# EAGLE board breakout (EAGLE 6.4)
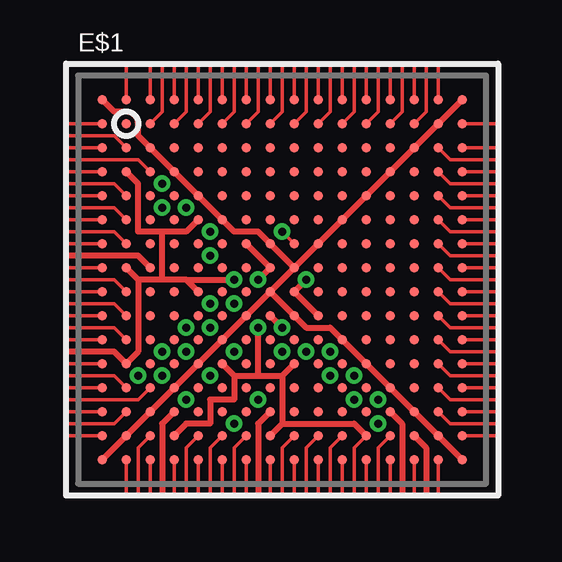
[diagram p0: board, top side]
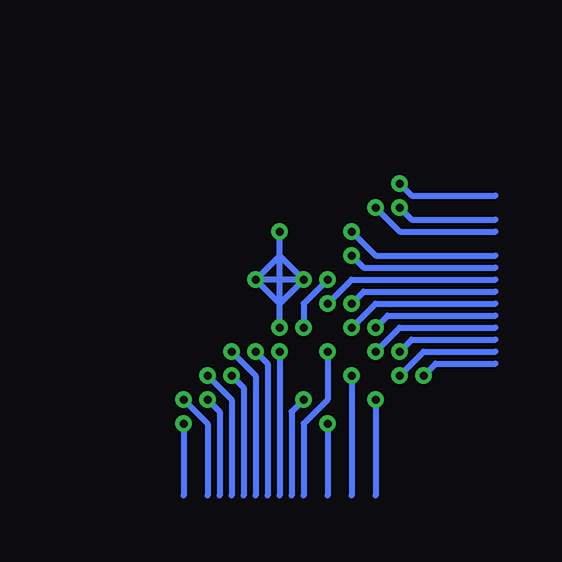
[diagram p1: board, bottom side, seen from below]

No outline drawn. Coordinates in mm, seen from the top.
Copper layers (1*16): Top 0.0356mm / dielectric 1.5011mm / Bottom 0.0356mm
Design rules "OSHPark_mine": minimum track width 6mil, minimum drill 13mil, track to track 6mil, track to pad 6mil, pad to pad 6mil, via to via 6mil, smd to smd 6mil, copper to edge 15mil, drill to drill 6mil, minimum pad ring 7mil, minimum via ring 7mil, stop-mask expansion 2mil, vias tented up to drill 13mil, thermal gap 10mil

## Footprints (pad centres in the part's own frame; a part is rotated, then mirrored left to right if it is on the bottom)
XILINX_FT256 = smd 0.4 x 0.4: A1 -7.5,7.5; A2 -6.5,7.5; A3 -5.5,7.5; A4 -4.5,7.5; A5 -3.5,7.5; A6 -2.5,7.5; A7 -1.5,7.5; A8 -0.5,7.5; A9 0.5,7.5; A10 1.5,7.5; A11 2.5,7.5; A12 3.5,7.5; A13 4.5,7.5; A14 5.5,7.5; A15 6.5,7.5; A16 7.5,7.5; B1 -7.5,6.5; B2 -6.5,6.5; B3 -5.5,6.5; B4 -4.5,6.5; B5 -3.5,6.5; B6 -2.5,6.5; B7 -1.5,6.5; B8 -0.5,6.5; B9 0.5,6.5; B10 1.5,6.5; B11 2.5,6.5; B12 3.5,6.5; B13 4.5,6.5; B14 5.5,6.5; B15 6.5,6.5; B16 7.5,6.5; C1 -7.5,5.5; C2 -6.5,5.5; C3 -5.5,5.5; C4 -4.5,5.5; C5 -3.5,5.5; C6 -2.5,5.5; C7 -1.5,5.5; C8 -0.5,5.5; C9 0.5,5.5; C10 1.5,5.5; C11 2.5,5.5; C12 3.5,5.5; C13 4.5,5.5; C14 5.5,5.5; C15 6.5,5.5; C16 7.5,5.5; D1 -7.5,4.5; D2 -6.5,4.5; D3 -5.5,4.5; D4 -4.5,4.5; D5 -3.5,4.5; D6 -2.5,4.5; D7 -1.5,4.5; D8 -0.5,4.5; D9 0.5,4.5; D10 1.5,4.5; D11 2.5,4.5; D12 3.5,4.5; D13 4.5,4.5; D14 5.5,4.5; D15 6.5,4.5; D16 7.5,4.5; E1 -7.5,3.5; E2 -6.5,3.5; E3 -5.5,3.5; E4 -4.5,3.5; E5 -3.5,3.5; E6 -2.5,3.5; E7 -1.5,3.5; E8 -0.5,3.5; E9 0.5,3.5; E10 1.5,3.5; E11 2.5,3.5; E12 3.5,3.5; E13 4.5,3.5; E14 5.5,3.5; E15 6.5,3.5; E16 7.5,3.5; F1 -7.5,2.5; F2 -6.5,2.5; F3 -5.5,2.5; F4 -4.5,2.5; F5 -3.5,2.5; F6 -2.5,2.5; F7 -1.5,2.5; F8 -0.5,2.5; F9 0.5,2.5; F10 1.5,2.5; F11 2.5,2.5; F12 3.5,2.5; F13 4.5,2.5; F14 5.5,2.5; F15 6.5,2.5; F16 7.5,2.5; G1 -7.5,1.5; G2 -6.5,1.5; G3 -5.5,1.5; G4 -4.5,1.5; G5 -3.5,1.5; G6 -2.5,1.5; G7 -1.5,1.5; G8 -0.5,1.5; G9 0.5,1.5; G10 1.5,1.5; G11 2.5,1.5; G12 3.5,1.5; G13 4.5,1.5; G14 5.5,1.5; G15 6.5,1.5; G16 7.5,1.5; H1 -7.5,0.5; H2 -6.5,0.5; H3 -5.5,0.5; H4 -4.5,0.5; H5 -3.5,0.5; H6 -2.5,0.5; H7 -1.5,0.5; H8 -0.5,0.5; H9 0.5,0.5; H10 1.5,0.5; H11 2.5,0.5; H12 3.5,0.5; H13 4.5,0.5; H14 5.5,0.5; H15 6.5,0.5; H16 7.5,0.5; J1 -7.5,-0.5; J2 -6.5,-0.5; J3 -5.5,-0.5; J4 -4.5,-0.5; J5 -3.5,-0.5; J6 -2.5,-0.5; J7 -1.5,-0.5; J8 -0.5,-0.5; J9 0.5,-0.5; J10 1.5,-0.5; J11 2.5,-0.5; J12 3.5,-0.5; J13 4.5,-0.5; J14 5.5,-0.5; J15 6.5,-0.5; J16 7.5,-0.5; K1 -7.5,-1.5; K2 -6.5,-1.5; K3 -5.5,-1.5; K4 -4.5,-1.5; K5 -3.5,-1.5; K6 -2.5,-1.5; K7 -1.5,-1.5; K8 -0.5,-1.5; K9 0.5,-1.5; K10 1.5,-1.5; K11 2.5,-1.5; K12 3.5,-1.5; K13 4.5,-1.5; K14 5.5,-1.5; K15 6.5,-1.5; K16 7.5,-1.5; L1 -7.5,-2.5; L2 -6.5,-2.5; L3 -5.5,-2.5; L4 -4.5,-2.5; L5 -3.5,-2.5; L6 -2.5,-2.5; L7 -1.5,-2.5; L8 -0.5,-2.5; L9 0.5,-2.5; L10 1.5,-2.5; L11 2.5,-2.5; L12 3.5,-2.5; L13 4.5,-2.5; L14 5.5,-2.5; L15 6.5,-2.5; L16 7.5,-2.5; M1 -7.5,-3.5; M2 -6.5,-3.5; M3 -5.5,-3.5; M4 -4.5,-3.5; M5 -3.5,-3.5; M6 -2.5,-3.5; M7 -1.5,-3.5; M8 -0.5,-3.5; M9 0.5,-3.5; M10 1.5,-3.5; M11 2.5,-3.5; M12 3.5,-3.5; M13 4.5,-3.5; M14 5.5,-3.5; M15 6.5,-3.5; M16 7.5,-3.5; N1 -7.5,-4.5; N2 -6.5,-4.5; N3 -5.5,-4.5; N4 -4.5,-4.5; N5 -3.5,-4.5; N6 -2.5,-4.5; N7 -1.5,-4.5; N8 -0.5,-4.5; N9 0.5,-4.5; N10 1.5,-4.5; N11 2.5,-4.5; N12 3.5,-4.5; N13 4.5,-4.5; N14 5.5,-4.5; N15 6.5,-4.5; N16 7.5,-4.5; P1 -7.5,-5.5; P2 -6.5,-5.5; P3 -5.5,-5.5; P4 -4.5,-5.5; P5 -3.5,-5.5; P6 -2.5,-5.5; P7 -1.5,-5.5; P8 -0.5,-5.5; P9 0.5,-5.5; P10 1.5,-5.5; P11 2.5,-5.5; P12 3.5,-5.5; P13 4.5,-5.5; P14 5.5,-5.5; P15 6.5,-5.5; P16 7.5,-5.5; R1 -7.5,-6.5; R2 -6.5,-6.5; R3 -5.5,-6.5; R4 -4.5,-6.5; R5 -3.5,-6.5; R6 -2.5,-6.5; R7 -1.5,-6.5; R8 -0.5,-6.5; R9 0.5,-6.5; R10 1.5,-6.5; R11 2.5,-6.5; R12 3.5,-6.5; R13 4.5,-6.5; R14 5.5,-6.5; R15 6.5,-6.5; R16 7.5,-6.5; T1 -7.5,-7.5; T2 -6.5,-7.5; T3 -5.5,-7.5; T4 -4.5,-7.5; T5 -3.5,-7.5; T6 -2.5,-7.5; T7 -1.5,-7.5; T8 -0.5,-7.5; T9 0.5,-7.5; T10 1.5,-7.5; T11 2.5,-7.5; T12 3.5,-7.5; T13 4.5,-7.5; T14 5.5,-7.5; T15 6.5,-7.5; T16 7.5,-7.5

## Placement (x,y rotation side)
E$1  [XILINX_FT256]  9,9 0 top

## Library data of the parts
E$1 = kmod

## Nets
S$2: E$1.T2
S$3: E$1.T3
S$4: E$1.T4
S$5: E$1.T5
S$6: E$1.T6
S$7: E$1.T7
S$8: E$1.T8
S$9: E$1.T9
S$10: E$1.T10
S$11: E$1.T11
S$12: E$1.T12
S$13: E$1.T13
S$14: E$1.T14
S$15: E$1.T15
S$16: E$1.G7 E$1.G9 E$1.H8 E$1.J9 E$1.K8 E$1.K10
S$17: E$1.R16
S$18: E$1.P16
S$19: E$1.N16
S$20: E$1.M16
S$21: E$1.L16
S$22: E$1.K16
S$23: E$1.J16
S$24: E$1.H16
S$25: E$1.G16
S$26: E$1.F16
S$27: E$1.E16
S$28: E$1.D16
S$29: E$1.C16
S$30: E$1.B16
S$31: E$1.D2 E$1.F5 E$1.H2 E$1.J5 E$1.M2 E$1.M6 E$1.M9 E$1.R4 E$1.R8 E$1.R12
S$32: E$1.A15
S$33: E$1.A14
S$34: E$1.A13
S$35: E$1.A12
S$36: E$1.A11
S$37: E$1.A10
S$38: E$1.A9
S$39: E$1.A8
S$40: E$1.A7
S$41: E$1.A6
S$42: E$1.A5
S$43: E$1.A4
S$44: E$1.A3
S$45: E$1.A2
S$46: E$1.P4
S$47: E$1.B1
S$48: E$1.C1
S$49: E$1.D1
S$50: E$1.E1
S$51: E$1.F1
S$52: E$1.G1
S$53: E$1.H1
S$54: E$1.J1
S$55: E$1.K1
S$56: E$1.L1
S$57: E$1.M1
S$58: E$1.N1
S$59: E$1.P1
S$60: E$1.R1
S$61: E$1.P8
S$62: E$1.R3
S$63: E$1.H3
S$64: E$1.R5
S$65: E$1.R6
S$66: E$1.R7
S$68: E$1.R9
S$69: E$1.R10
S$70: E$1.R11
S$72: E$1.R13
S$73: E$1.R14
S$75: E$1.P15
S$76: E$1.N15
S$77: E$1.M15
S$78: E$1.L15
S$79: E$1.K15
S$80: E$1.J15
S$81: E$1.H15
S$82: E$1.G15
S$83: E$1.F15
S$84: E$1.E15
S$85: E$1.D15
S$86: E$1.C15
S$88: E$1.B14
S$89: E$1.B13
S$90: E$1.B12
S$91: E$1.B11
S$92: E$1.B10
S$93: E$1.B9
S$94: E$1.B8
S$95: E$1.B7
S$96: E$1.B6
S$97: E$1.B5
S$98: E$1.B4
S$99: E$1.B3
S$100: E$1.P2
S$101: E$1.C2
S$102: E$1.D3
S$103: E$1.E2
S$104: E$1.F2
S$105: E$1.G2
S$106: E$1.N3
S$107: E$1.J2
S$108: E$1.K2
S$109: E$1.L2
S$110: E$1.A1 E$1.A16 E$1.B15 E$1.C3 E$1.C14 E$1.D4 E$1.D13 E$1.E5 E$1.E12 E$1.F6 E$1.F11 E$1.G8 E$1.G10 E$1.H9 E$1.J8 E$1.K7 E$1.K9 E$1.L6 E$1.L11 E$1.M5 E$1.M12 E$1.N4 E$1.N13 E$1.P3 E$1.P14 E$1.R2 E$1.R15 E$1.T1 E$1.T16
S$111: E$1.N2
S$112: E$1.P13

## Tracks (layer width: path | path; a pad name or v marks a point on that pad's centre or on a via)
S$1  (via drill 0.33 pad 0.69)
  Bottom 0.254: v10,6 9.5,5.5 9.5,0
S$2
  Top 0.152: E$1.T2 2.5,0
S$3
  Top 0.152: E$1.T3 3.5,0
S$4
  Top 0.152: E$1.T4 4.5,0
S$5
  Top 0.152: E$1.T5 5.5,0
S$6
  Top 0.152: E$1.T6 6.5,0
S$7
  Top 0.152: 7.5,0 E$1.T7
S$8
  Top 0.152: E$1.T8 8.5,0
S$9
  Top 0.152: E$1.T9 9.5,0
S$10
  Top 0.152: 10.5,0 E$1.T10
S$11
  Top 0.152: E$1.T11 11.5,0
S$12
  Top 0.152: 12.5,0 E$1.T12
S$13
  Top 0.152: E$1.T13 13.5,0
S$14
  Top 0.152: 14.5,0 E$1.T14
S$15
  Top 0.152: E$1.T15 15.5,0
S$16  (via drill 0.33 pad 0.69)
  Top 0.152: v9,11 E$1.G9
  Top 0.254: E$1.G7 E$1.H8 v8,9 | E$1.K10 E$1.J9 v10,9 | v9,7 E$1.K8
  Bottom 0.254: v8,9 9,9 | 9,9 v10,9 | v9,7 9,8 | 9,8 9,9 | 9,9 9,10 | 9,10 v9,11 | v10,9 9,10 | 9,10 v8,9 | v8,9 9,8 | 9,8 v10,9
S$17
  Top 0.152: E$1.R16 18,2.5
S$18
  Top 0.152: 18,3.5 E$1.P16
S$19
  Top 0.152: E$1.N16 18,4.5
S$20
  Top 0.152: 18,5.5 E$1.M16
S$21
  Top 0.152: E$1.L16 18,6.5
S$22
  Top 0.152: 18,7.5 E$1.K16
S$23
  Top 0.152: E$1.J16 18,8.5
S$24
  Top 0.152: 18,9.5 E$1.H16
S$25
  Top 0.152: E$1.G16 18,10.5
S$26
  Top 0.152: 18,11.5 E$1.F16
S$27
  Top 0.152: E$1.E16 18,12.5
S$28
  Top 0.152: E$1.D16 18,13.5
S$29
  Top 0.152: E$1.C16 18,14.5
S$30
  Top 0.152: E$1.B16 18,15.5
S$31  (via drill 0.33 pad 0.69)
  Top 0.152: E$1.R12 12,2 12,0
  Top 0.254: E$1.F5 5,11 4,11 | E$1.J5 5,9 | 5,9 4,9 | 4,9 3,9 | E$1.H2 3,9 | 3,9 3,6 E$1.M2 2,6 0,6 | 4,9 4,11 | 4,11 3,11 3,13 E$1.D2 | 5,9 v7,9 | E$1.M9 9,5 | 9,5 9,3 | E$1.R8 9,3 | 9,3 12,3 E$1.R12 | 7,5 E$1.M6 | 7,5 8,5 | 8,5 9,5 | 8,5 v8,7 | 7,5 7,4 6,4 6,3 5,3 E$1.R4
  Bottom 0.254: v7,9 8,8 v8,7
S$32
  Top 0.152: E$1.A15 15.5,18
S$33
  Top 0.152: 14.5,18 E$1.A14
S$34
  Top 0.152: E$1.A13 13.5,18
S$35
  Top 0.152: 12.5,18 E$1.A12
S$36
  Top 0.152: E$1.A11 11.5,18
S$37
  Top 0.152: 10.5,18 E$1.A10
S$38
  Top 0.152: E$1.A9 9.5,18
S$39
  Top 0.152: 8.5,18 E$1.A8
S$40
  Top 0.152: E$1.A7 7.5,18
S$41
  Top 0.152: 6.5,18 E$1.A6
S$42
  Top 0.152: E$1.A5 5.5,18
S$43
  Top 0.152: 4.5,18 E$1.A4
S$44
  Top 0.152: E$1.A3 3.5,18
S$45
  Top 0.152: 2.5,18 E$1.A2
S$46
  Top 0.254: E$1.P4 4,3 4,0
S$47
  Top 0.152: E$1.B1 0,15.5
S$48
  Top 0.152: E$1.C1 0,14.5
S$49
  Top 0.152: 0,13.5 E$1.D1
S$50
  Top 0.152: E$1.E1 0,12.5
S$51
  Top 0.152: 0,11.5 E$1.F1
S$52
  Top 0.152: E$1.G1 0,10.5
S$53
  Top 0.152: 0,9.5 E$1.H1
S$54
  Top 0.152: E$1.J1 0,8.5
S$55
  Top 0.152: 0,7.5 E$1.K1
S$56
  Top 0.152: E$1.L1 0,6.5
S$57
  Top 0.152: 0,5.5 E$1.M1
S$58
  Top 0.152: E$1.N1 0,4.5
S$59
  Top 0.152: 0,3.5 E$1.P1
S$60
  Top 0.152: E$1.R1 0,2.5
S$61
  Top 0.254: E$1.P8 8,3 8,0
S$62
  Top 0.152: E$1.R3 3,2 3,0
S$63
  Top 0.254: E$1.H3 3,10 0,10
S$64
  Top 0.152: E$1.R5 5,2 5,0
S$65
  Top 0.152: E$1.R6 6,2 6,0
S$66
  Top 0.152: E$1.R7 7,2 7,0
S$67  (via drill 0.33 pad 0.69)
  Bottom 0.254: v5,4 5,0
S$68
  Top 0.152: E$1.R9 9,2 9,0
S$69
  Top 0.152: E$1.R10 10,2 10,0
S$70
  Top 0.152: E$1.R11 11,2 11,0
S$71  (via drill 0.33 pad 0.69)
  Bottom 0.254: v7,3 7,0
S$72
  Top 0.152: E$1.R13 13,2 13,0
S$73
  Top 0.254: E$1.R14 15,2 15,0
S$74  (via drill 0.33 pad 0.69)
  Bottom 0.254: v6,5 6,0
S$75
  Top 0.152: E$1.P15 16,3 18,3
S$76
  Top 0.152: E$1.N15 16,4 18,4
S$77
  Top 0.152: E$1.M15 16,5 18,5
S$78
  Top 0.152: E$1.L15 16,6 18,6
S$79
  Top 0.152: E$1.K15 16,7 18,7
S$80
  Top 0.152: E$1.J15 16,8 18,8
S$81
  Top 0.152: E$1.H15 16,9 18,9
S$82
  Top 0.152: E$1.G15 16,10 18,10
S$83
  Top 0.152: E$1.F15 16,11 18,11
S$84
  Top 0.152: E$1.E15 16,12 18,12
S$85
  Top 0.152: E$1.D15 16,13 18,13
S$86
  Top 0.152: E$1.C15 16,14 18,14
S$88
  Top 0.152: E$1.B14 15,16 15,18
S$89
  Top 0.152: E$1.B13 14,16 14,18
S$90
  Top 0.152: E$1.B12 13,16 13,18
S$91
  Top 0.152: E$1.B11 12,16 12,18
S$92
  Top 0.152: E$1.B10 11,16 11,18
S$93
  Top 0.152: E$1.B9 10,16 10,18
S$94
  Top 0.152: E$1.B8 9,16 9,18
S$95
  Top 0.152: E$1.B7 8,16 8,18
S$96
  Top 0.152: E$1.B6 7,16 7,18
S$97
  Top 0.152: E$1.B5 6,16 6,18
S$98
  Top 0.152: E$1.B4 5,16 5,18
S$99
  Top 0.152: E$1.B3 4,16 4,18
S$100
  Top 0.152: E$1.P2 2,3 0,3
S$101
  Top 0.152: E$1.C2 2,15 0,15
S$102
  Top 0.152: E$1.D3 3,14 0,14
S$103
  Top 0.152: E$1.E2 2,13 0,13
S$104
  Top 0.152: E$1.F2 2,12 0,12
S$105
  Top 0.152: E$1.G2 2,11 0,11
S$106
  Top 0.152: E$1.N3 3,4 0,4
S$107
  Top 0.152: E$1.J2 2,9 0,9
S$108
  Top 0.152: E$1.K2 2,8 0,8
S$109
  Top 0.152: E$1.L2 2,7 0,7
S$110
  Top 0.254: E$1.A1 2,16 2.5,16 arc-90 3,15.5 3,15 E$1.C3 E$1.D4 E$1.E5 E$1.F6 7,11 8,11 E$1.G8 E$1.H9 | E$1.A16 E$1.B15 E$1.C14 E$1.D13 E$1.E12 E$1.F11 E$1.G10 E$1.H9 | E$1.J8 E$1.K7 E$1.L6 E$1.M5 E$1.N4 E$1.P3 E$1.R2 E$1.T1 | E$1.J8 E$1.K9 10,7 11,7 E$1.L11 E$1.M12 E$1.N13 E$1.P14 E$1.R15 E$1.T16 | E$1.H9 E$1.J8
S$111
  Top 0.152: E$1.N2 2,5 0,5
S$112
  Top 0.254: E$1.P13 14,3 14,0
S$113  (via drill 0.33 pad 0.69)
  Bottom 0.254: v5,12 4,11 0,11
S$114  (via drill 0.33 pad 0.69)
  Bottom 0.254: v4,12 3.5,11.5 0,11.5
S$115  (via drill 0.33 pad 0.69)
  Bottom 0.254: v4,13 3.5,12.5 0,12.5
S$116  (via drill 0.33 pad 0.69)
  Bottom 0.254: v6,11 5,10 0,10
S$117  (via drill 0.33 pad 0.69)
  Bottom 0.254: v13,3 13,0
S$118  (via drill 0.33 pad 0.69)
  Bottom 0.254: v6,10 5.5,9.5 0,9.5
S$119  (via drill 0.33 pad 0.69)
  Bottom 0.254: v13,4 12,3 12,0
S$120  (via drill 0.33 pad 0.69)
  Bottom 0.254: v12,4 11.5,3.5 11.5,0
S$121  (via drill 0.33 pad 0.69)
  Bottom 0.254: v12,5 11,4 11,0
S$122  (via drill 0.33 pad 0.69)
  Bottom 0.254: v7,8 6,9 0,9
S$123  (via drill 0.33 pad 0.69)
  Bottom 0.254: v6,8 5.5,8.5 0,8.5
S$124  (via drill 0.33 pad 0.69)
  Bottom 0.254: v6,7 5,8 0,8
S$125  (via drill 0.33 pad 0.69)
  Bottom 0.254: v5,7 4.5,7.5 0,7.5
S$126  (via drill 0.33 pad 0.69)
  Bottom 0.254: v11,5 10.5,4.5 10.5,0
S$127  (via drill 0.33 pad 0.69)
  Bottom 0.254: v11,6 10,5 10,0
S$128  (via drill 0.33 pad 0.69)
  Bottom 0.254: v7,6 7,4 8,3 8,0
S$129  (via drill 0.33 pad 0.69)
  Bottom 0.254: v4,6 3.5,6.5 0,6.5
S$130  (via drill 0.33 pad 0.69)
  Bottom 0.254: v5,6 4,7 0,7
S$131  (via drill 0.33 pad 0.69)
  Bottom 0.254: v4,5 3,6 0,6
S$132  (via drill 0.33 pad 0.69)
  Bottom 0.254: v3,5 2.5,5.5 0,5.5
S$133  (via drill 0.33 pad 0.69)
  Bottom 0.254: v9,6 9,0
S$134  (via drill 0.33 pad 0.69)
  Bottom 0.254: v8,4 8.5,3.5 8.5,0